# Altium PCB PCB1.PcbDoc
Units mm, origin at the board's own origin, x right, y up, seen from the top; angles counter-clockwise.
Board outline 64 x 36 mm, 2 copper layers (Top Layer, Bottom Layer); 12 components, 8 nets, 41 pads, 3 vias.
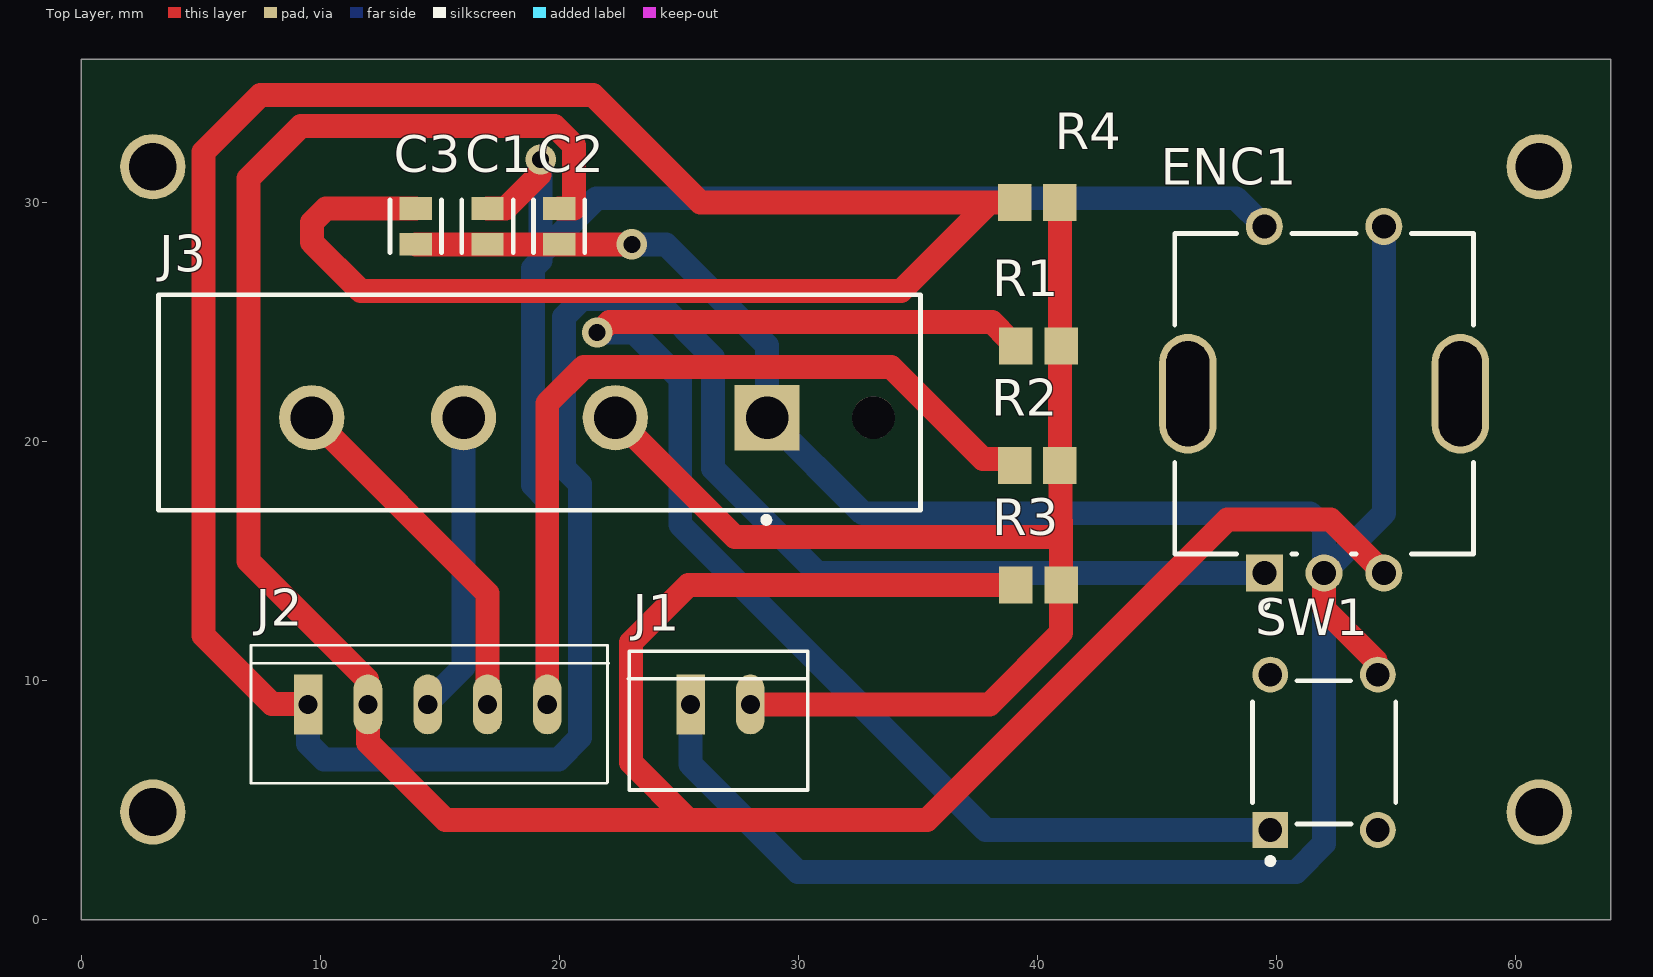
[diagram p0: Top Layer view]
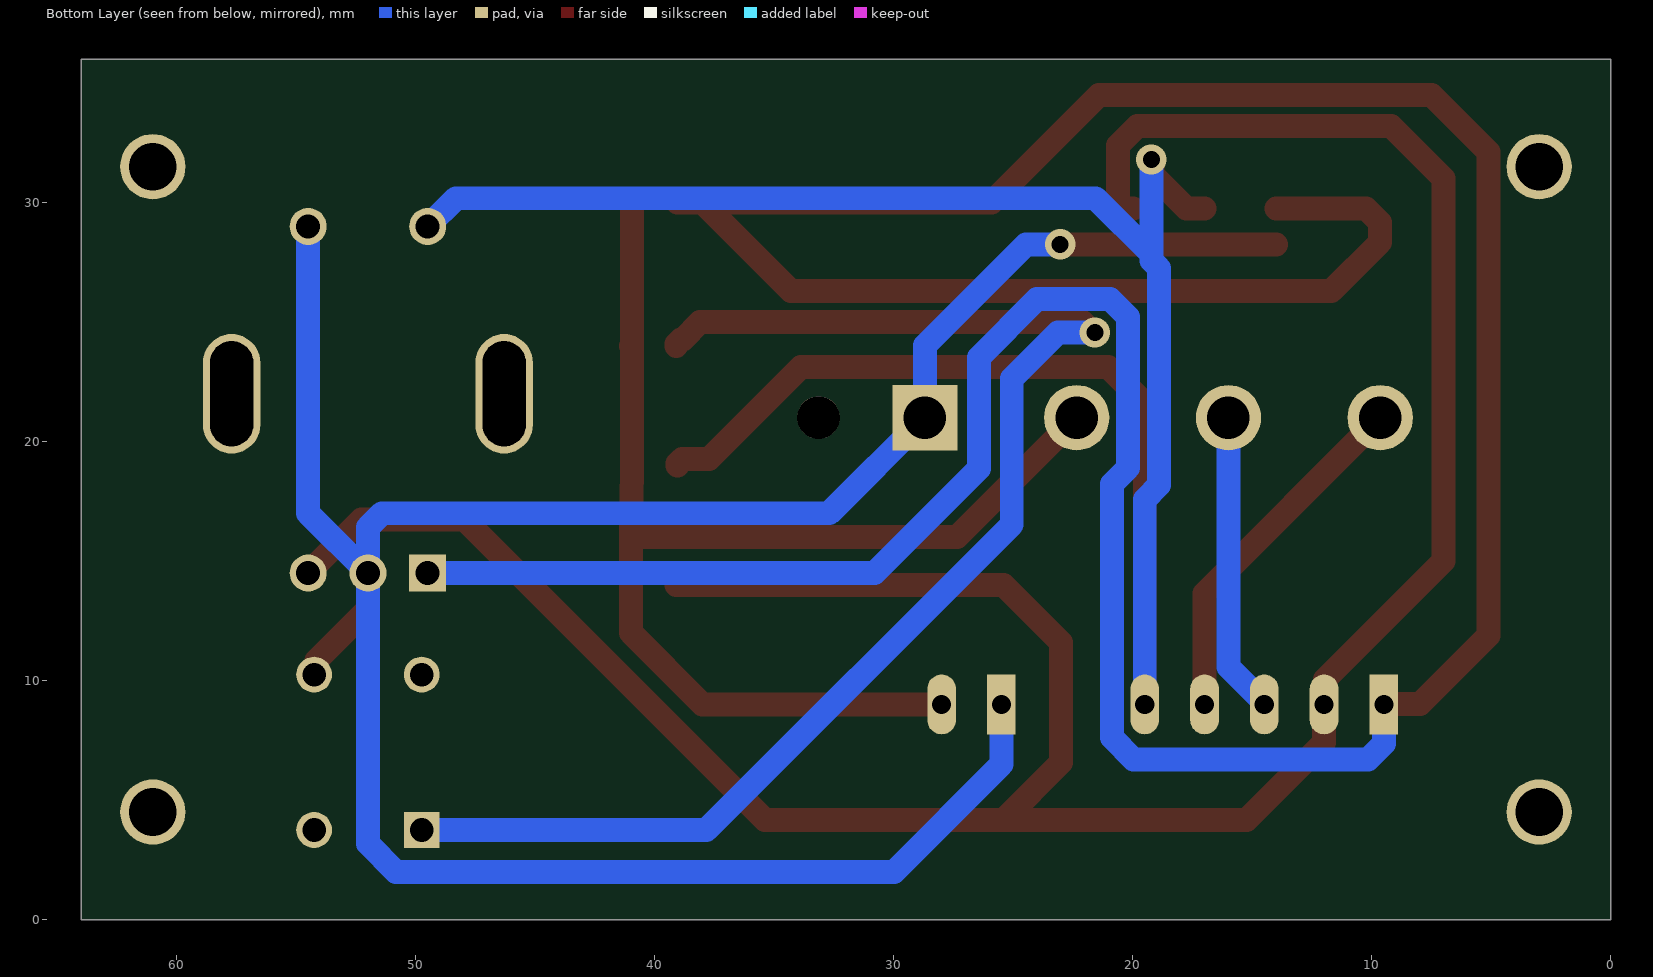
[diagram p1: Bottom Layer view, seen from below]
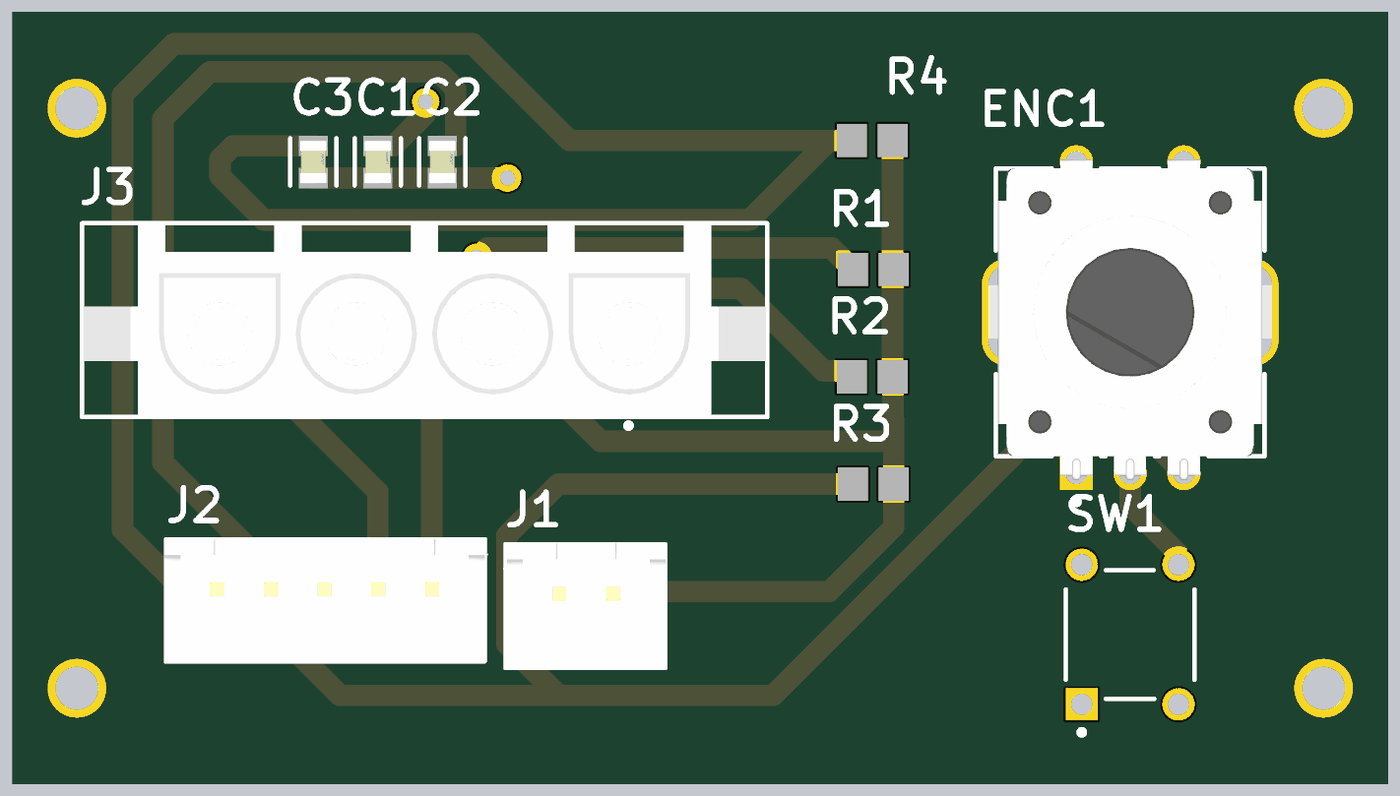
[diagram p2: 3D render of the assembled board from above, using the file's embedded part models]

## Layer stack, top to bottom
Top Solder: solder mask 0.0102, Solder Resist, Dk 3.5
Top Layer: signal copper 0.0356
Dielectric 1: dielectric 0.32, FR-4, Dk 4.8
Bottom Layer: signal copper 0.0356
Bottom Solder: solder mask 0.0102, Solder Resist, Dk 3.5

## Board outline
0,0 64,0 64,36 0,36

## Design rules (kind name [scope] priority, off if disabled: settings)
Clearance [All] p1: gap=0.254 ignorepadtopadclearanceinfootprint=FALSE except(0.3: Arc-Arc Arc-Track Track-Track)
PolygonConnect [All] p1: connectstyle=Relief reliefconductorwidth=0.254 reliefentries=4 polygonreliefangle="90 Angle" airgapwidth=0.254
RoutingVias [All] p1: holewidth=0.711 width=1.27 viastyle="Through Hole" minholewidth=0.711 minwidth=1.27 maxholewidth=0.711 maxwidth=1.27
SolderMaskExpansion [All] p1: expansion=0.102 istentingtop=FALSE
Width [All] p1: maxlimit=1 minlimit=1 preferedwidth=1 minimp=50.000000 maximp=50.000000 favimp=50.000000
30 further rules are at their usual default settings.

## Classes and differential pairs
component class SheetCopied: C1 C2 C3 ENC1 J3 R1 R2 R3 R4 SW1

## Components (designator, comment, footprint, x,y, rotation, side; value= is the part's Value field where it differs from the comment)
C1 "Cap" FP-C0805C-DN-MFG 17,29 r270 top value="0.10 μF"
C2 "Cap" FP-C0805C-DN-MFG 20,29 r270 top value="0.10 μF"
C3 "Cap" FP-C0805C-DN-MFG 14,29 r270 top value="0.10 μF"
ENC1 "PEC11R-4215F-S0024" FP-PEC11R-4215F-S0024-MFG 52,22 r0 top
J1 "Power" JST_2P 25.5,9 r90 top
J2 "JST_5P" JST_5P 19.5,9 r90 top
J3 "OLED" FP-643416-1-MFG 19.175,21.635 r180 top
R1 "Res" RESC2013X60X40ML20T25 40.05,24 r180 top
R2 "Res" RESC2013X60X40ML20T25 40,19 r0 top
R3 "Res" RESC2013X60X40ML20T25 40.05,14 r0 top
R4 "Res" RESC2013X60X40ML20T25 40,30 r0 top
SW1 "1825910-6" TECO-1825910-6_V 52,7 r90 top

## Footprints (in the part's own frame and the unit in brackets; to place one, negate y for a bottom-side part, rotate by r counter-clockwise, add the part's x,y. Pads: shape width x height; smd on the part's side, far side on the other; paste and mask are expansions set on the pad)
FP-643416-1-MFG [mm]
  rect 2.73x2.73 hole 1.78 paste-1000 mask+0: 1(-9.525,0.635)
  round 2.73 hole 1.78 paste-1000 mask+0: 2(-3.175,0.635) 3(3.175,0.635) 4(9.525,0.635)
  round 1.78 hole 1.78 unplated paste-1000 mask+0: ""(-13.975,0.635)
  silkscreen extent -15.94,-4.51 15.94,5.03, body extent -16.04,-4.61 16.04,4.61, height 0.25
FP-C0805C-DN-MFG [mm]
  rect 0.95x1.35 smd paste+0 mask+0: 1(-0.75,0) 2(0.75,0)
  silkscreen extent -1.1,-1.07 1.1,1.07, body extent -1.4,-0.85 1.4,0.85, height 0.25
FP-PEC11R-4215F-S0024-MFG [mm]
  round 1.55 hole 1 paste-1000 mask+0: 1(-2.5,7) 2(2.5,7) B(2.5,-7.5) C(0,-7.5)
  rrect100% 2.4x5 hole 4.4 slot 1.8 at 0 deg paste-1000 mask+0: 3(-5.7,0) 4(5.7,0)
  rect 1.55x1.55 hole 1 paste-1000 mask+0: A(-2.5,-7.5)
  silkscreen extent -6.25,-8.95 6.25,6.7, body extent -7,-8.37 7,7.88, height 0.25
JST_2P [mm]
  rect 2.5x1.2 hole 0.8: 1(0,0)
  oval 2.5x1.2 hole 0.8: 2(0,-2.5)
  silkscreen extent -3.58,-4.9 2.22,2.6, body extent -3.5,-4.9 2.25,2.5, height 7.01
JST_5P [mm]
  rect 2.5x1.2 hole 0.8: 1(0,10)
  oval 2.5x1.2 hole 0.8: 2(0,7.5) 3(0,5) 4(0,2.5) 5(0,0)
  silkscreen extent -3.3,-2.58 2.47,12.4, body extent -3.3,-2.47 2.45,12.43, height 6.91
RESC2013X60X40ML20T25 [mm] "Chip Resistor, 2-Leads, Body 2.00x1.25mm, IPC Low Density"
  rect 1.4x1.55 smd: 1(-0.95,0) 2(0.95,0)
  body extent -1.1,-0.72 1.1,0.72, height 0.6
TECO-1825910-6_V [mm] "Switch, 4-Leads, Body 5.99x5.99mm"
  rect 1.5x1.5 hole 0.99: 1(-3.25,2.25)
  round 1.5 hole 0.99: 2(3.25,2.25) 3(-3.25,-2.25) 4(3.25,-2.25)
  silkscreen extent -4.67,-3 3,3, body extent -3,-2.99 2.99,3, height 5

## Part data
C1 C2 C3: library part CMP-2007-00279-2, "CAP CER 0.1UF 50V X7R 0805", Capacitance="0.10 μF", Manufacturer=KEMET, Manufacturer Part Number=C0805C104K5RACTU, Package=C0805C-DN, Temperature="-55°C to +125°C", Temperature Characteristic=X7R, Temperature Coefficient=30ppm/°C, Temperature Range High=+125°C, Temperature Range Low=-55°C, Tolerance=0.1, Voltage Rating="50 V", Automotive=No, Category=Cap, ComponentLink2Description=Datasheet, ComponentLink2URL=https://content.kemet.com/datasheets/KEM_C1003_C0G_SMD.pdf, Device Class L1="Passive Components", Device Class L2=Capacitors, Device Class L3="Ceramic Capacitors", Digikey Description="CAP CER 0.1UF 50V X7R 0805", Height=0.88mm, Ipc Land Pattern Name=CAPC200125X78, Lead Free=Yes, Material=Ceramic, Mouser Description="Cap Ceramic 0.1uF 50V X7R 10% SMD 2.0 x 1.2 mm 125 C Paper T/R", Octopart=https://octopart.com/c0805c104k5ractu-kemet-143926, RoHS=TRUE
ENC1: library part CMP-1747-00012-2, "ROTARY ENCODER MECHANICAL 24PPR", Max Operating Temperature=70°C, Min Operating Temperature=-30°C, Package Quantity=150, Built in Switch=Yes, Detent=Yes, Encoder Type=Mechanical, Height=13.4mm, Hole Diameter=1.8mm, Length=21.5mm, Mount="Through Hole", Number of Channels=2, Orientation=Vertical, Output Type=Quadrature, Packaging=Bulk, Pulses per Revolution=24, Radiation Hardening=No, REACH SVHC="No SVHC", RoHS Compliant=Yes, Series=PEC11R, Termination="PC Pins", Type=Mechanical, Width=12.5mm
J1: library part JST_2P
J3: library part CMP-03369-000025-1, "CONN HDR 4POS 0.25 TIN PCB", Current Rating=12A, Manufacturer=TE, Manufacturer Part Number=643416-1, Temperature="-40°C to +105°C", Temperature Range High=+105°C, Temperature Range Low=-40°C, Voltage Rating=600V, Automotive=No, Category=Conn, ComponentLink2Description=Datasheet, ComponentLink2URL=https://www.te.com/usa-en/product-643416-1.html?te_bu=Cor&te_type=other&te_campaign=oct_glo_cor-oct-global-oth-prtnr-fy19-oct-octo-buy-bom_sma-298_2&elqCampaignId=35216, Conn Gender=Female, Conn Orientation=Vertical, Contact Material=Tin, Device Class L1=Connectors, Device Class L2="Headers and Wire Housings", Device Class L3=unset, Digikey Description="CONN HDR 4POS 0.25 TIN PCB", Height=14.99mm, Is Female=yes, Lead Free=Yes, Mouser Description="Conn Power SKT 4 POS 6.35mm Solder ST Thru-Hole 4 Terminal 1 Port Bag", Number Of Contacts=4, Number Of Rows=1, Octopart=https://octopart.com/643416-1-te+connectivity-39538283, Package=643416-1, Pitch=6.35mm, RoHS=TRUE, Standoff Height=0.63mm
R1 R2 R3 R4: library part CMP-2001-00629-1, Manufacturer=Panasonic, Part Number=ERA6AEB332V
SW1: library part CMP-1684-00021-1, "Tact Switch, SPST-NO, 0.05 A, -35 to 85 degC, 4-Pin THD, RoHS, Bulk", Actuator Color=Black, Contact Rating @ Voltage=0.05A@24VDC, Dielectric Strength=500VAC, Manufacturer="TE Connectivity", Maximum AC Voltage Rating=N/A, Maximum Contact Resistance=100mOhm, Maximum DC Voltage Rating=24V, Minimum Insulation Resistance=100MOhm, Operating Temperature=-35to85C, Package Description="4-Pin Through Hole Device, Body 5.99 x 5.99 mm, Pitch 6.5 mm", Package Reference=THD, Actuator Length=1.4mm, Actuator Material=PolybutyleneTerephthalate, Actuator Style=RoundButton, Base Material=N/A, Body Orientation=Straight, Bushing Type=Unthreaded, Contact Material=CopperAlloy, Contact Plating=Silver, Datasheet URL=http://www.te.com/commerce/DocumentDelivery/DDEController?Action=showdoc&DocId=Customer+Drawing%7F1825910%7FC9%7Fpdf%7FEnglish%7FENG_CD_1825910_C9.pdf%7F1825910-6, Datasheet Version="Rev. C9", Dimension=5.99x5mm, Electrical Life=100000Cycles, Family=1825910, Function=MomentaryContact, Housing Material=N/A, Illumination=N/R, Manufacturer URL=http://www.te.com, Mechanical Life=100000Cycles, Mounting=ThroughHole, Packaging=N/A, Part No=1825910-6, Pole Throw Configuration=SPST, Product Weight=N/A, RoHS=Yes, Seal Description=N/A, Seal Location=N/A, Switch Configuration=OFF(ON), Terminal Type=PCPins, Thread Size=N/R

## Free pads (board coordinates)
  round 2.73 hole 2 paste-1000 mask+0: 2(3,4.5) 3(61,4.5) 4(61,31.5) 5(3,31.5)

## Via types
v1: diameter 1.27, hole 0.711, Top Layer to Bottom Layer, 3 vias

## Nets (pads, with @x,y where several pads share a name; then routed paths per layer and width w, separated by ;. In a path a pad name is that pad's centre, name@x,y a point inside that pad or via, vN(x,y) a via of type N, cw(c..) or ccw(c..) an arc to the next point about the centre after c; other vN are vias at no path point)
+5V: J1.2 J3.2 R1.1 R2.2 R3.2 R4.2 | length 53
  Top Layer w1: J3.2 27.35,16 41,16 ; J1.2 38,9 41,12 R3.2 41,16 ; R4.2 R1.1@40.95,24.05 ; R1.1 R1.1@40.95,24.05 ; R1.1@40.95,24.05 R2.2 40.95,18.95 41,16
CLK: C3.1 ENC1.A J2.1 R4.1 | length 167.3
  Top Layer w1: J2.1 9.486,9.014 7.986,9.014 5.119,11.881 5.119,32.119 7.501,34.501 21.417,34.501 25.919,30 38,30 ; C3.1 10.25,29.75 9.664,29.164 9.664,28.336 11.7,26.3 34.3,26.3 38,30 ; R4.1 38,30
  Bottom Layer w1: J2.1 9.5,7.366 10.16,6.706 19.964,6.706 20.879,7.62 20.879,18.224 20.201,18.902 20.201,25.205 20.955,25.959 24.003,25.959 26.441,23.52 26.441,18.872 30.814,14.5 ENC1.A
DT: C2.1 ENC1.B J2.2 R3.1 | length 119.3
  Top Layer w1: C2.1 20.619,29.75 20.619,32.385 19.802,33.201 9.201,33.201 7,31 7,15 11.962,10.038 11.962,9.038 J2.2 12,7.406 15.24,4.166 25.4,4.166 ; R3.1 25.405,14 23,11.595 23,6.566 25.4,4.166 ; ENC1.B 52.261,16.739 47.955,16.739 35.382,4.166 25.4,4.166
GND: C1.2 C2.2 C3.2 ENC1.2 ENC1.C J1.1 J3.1 SW1.4 | length 110
  Top Layer w1: C3.2 C1.2 C2.2 v1(23.038,28.25) ; ENC1.C 52,13 54.154,10.846 54.154,10.346 SW1.4
  Bottom Layer w1: v1(23.038,28.25) 24.468,28.25 28.7,24.018 J3.1 32.7,17 50,17 51.414,17 52,16.414 ENC1.C ; J1.1 25.5,6.5 30,2 50.825,2 52,3.175 ENC1.C ; ENC1.2 54.5,17 ENC1.C
PB: R1.2 SW1.1 | length 58.5
  Top Layer w1: v1(21.59,24.562) 21.663,24.562 22.101,25 38.1,25 38.825,24.275 38.9,24.275 39.1,24.075 R1.2
  Bottom Layer w1: v1(21.59,24.562) 23.139,24.562 25.064,22.637 25.064,16.532 37.846,3.75 SW1.1
SCK: J2.3 J3.3 | length 12.6
  Bottom Layer w1: J2.3 14.5,9.065 16,10.565 J3.3
SDA: J2.4 J3.4 | length 15
  Top Layer w1: J3.4 17,13.65 J2.4
SW: C1.1 ENC1.1 J2.5 R2.1 | length 92.8
  Top Layer w1: C1.1 17.75,29.75 19.176,31.176 19.176,31.749 v1(19.228,31.801) ; J2.5 19.5,21.59 21.029,23.119 26.899,23.119 33.881,23.119 37.727,19.273 38.85,19.273 39.05,19.073 R2.1
  Bottom Layer w1: v1(19.228,31.801) 19.228,27.848 ; J2.5 19.5,17.581 18.901,18.18 18.901,27.251 19.228,27.578 19.228,27.848 ; ENC1.1 48.321,30.179 21.559,30.179 19.228,27.848
pads on no net: ENC1.3 ENC1.4 J3. SW1.2 SW1.3